# Altium PCB wrist_band.PcbDoc
Units mm, origin at the board's own origin, x right, y up, seen from the top; angles counter-clockwise.
Board outline 221.25 x 41.05 mm, 2 copper layers (Top Layer, Bottom Layer), stack 0.279 mm thick; 17 components, 16 nets, 34 pads, 16 vias.
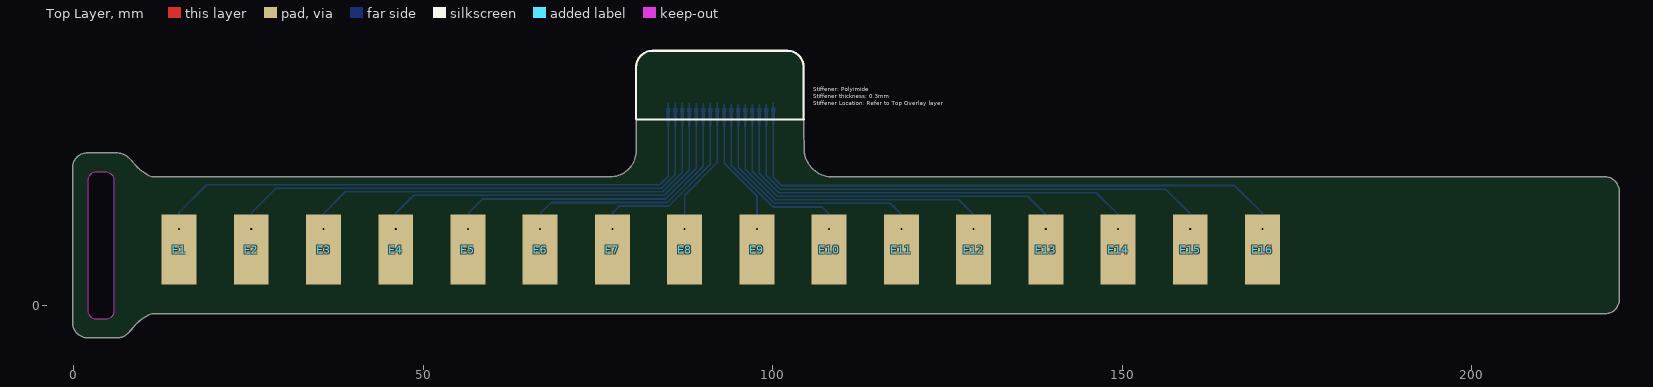
[diagram p0: Top Layer view]
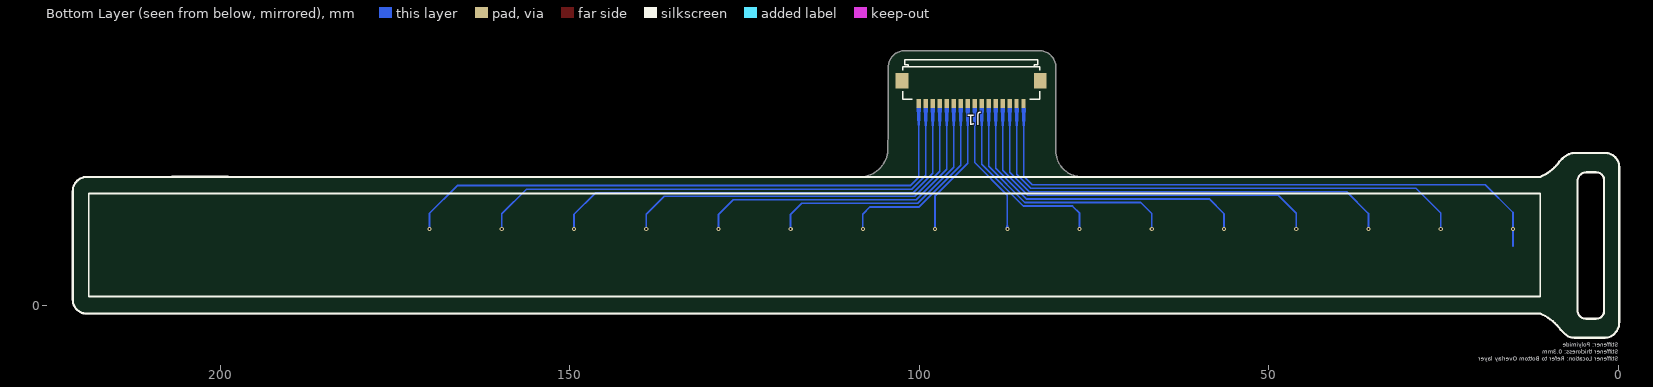
[diagram p1: Bottom Layer view, seen from below]

## Layer stack, top to bottom
Top Stiffener: core 0.1, Core-009, Dk 4.5
Top Coverlay: solder mask 0.0125, FC-001, Dk 2.9
Adhesive 2: prepreg 0.015, PP-006, Dk 4.1
Top Layer: signal copper 0.012
Polymide: core 0.025, Core-009, Dk 3.3
Bottom Layer: signal copper 0.012
Adhesive 1: prepreg 0.015, PP-006, Dk 4.1
Bottom Coverlay Bottom Coverlay: solder mask 0.0125, FC-001, Dk 2.9
Bottom Stiffener: core 0.1, Core-009, Dk 4.5

## Board outline
221.12,0.801 221.12,16.336 ccw(c219.056,16.336) 219.171,18.397 ccw(c219.056,16.338) 219.056,18.4 ccw(c219.056,18.4) 219.056,18.4 206.904,18.4 ccw(c206.88,18.391) 206.889,18.415 204.47,18.415 198.882,18.415 198.882,18.4 108.325,18.4 cw(c108.555,22.449) 104.505,22.22 104.43,25.193 104.436,26.67 104.437,26.965 104.436,26.965 104.436,34.107 ccw(c102.107,34.107) 102.107,36.436 82.814,36.436 ccw(c82.814,34.103) 80.481,34.103 80.481,26.67 80.484,26.67 80.484,22.129 80.484,22.128 cw(c76.755,22.128) 76.755,18.4 13.937,18.4 11.176,18.4 cw(c13.726,24.449) 8.402,20.609 7.928,21.083 ccw(c6.132,19.287) 6.132,21.827 1.947,21.827 ccw(c1.947,19.725) 0.46,21.211 0.451,21.202 ccw(c1.846,19.807) -0.127,19.807 -0.127,-2.61 ccw(c1.697,-2.61) 0.407,-3.9 0.56,-4.053 ccw(c1.926,-2.688) 1.926,-4.619 6.294,-4.619 ccw(c6.294,-2.638) 7.695,-4.039 8.257,-3.476 cw(c13.757,-7.445) 11.176,-1.173 19.42,-1.172 219.147,-1.172 ccw(c219.147,0.801)
cut-out: 5.842,17.78 ccw(c4.572,17.78) 4.572,19.05 3.175,19.05 ccw(c3.175,17.907) 2.032,17.907 2.032,-0.762 ccw(c3.175,-0.762) 3.175,-1.905 4.639,-1.905 ccw(c4.639,-0.702) 5.842,-0.702
board region "Layer Stack Region 2": 11.176,18.4 10.971,18.491 10.57,18.693 10.184,18.922 9.815,19.177 9.464,19.456 9.133,19.759 8.823,20.084 8.536,20.429 8.402,20.609 7.928,21.083 7.751,21.26 7.335,21.538 6.873,21.729 6.382,21.827 6.132,21.827 1.947,21.827 1.74,21.827 1.334,21.746 0.951,21.588 0.607,21.358 0.46,21.211 0.451,21.202 0.313,21.064 0.097,20.741 -0.051,20.382 -0.127,20.001 -0.127,19.807 -0.127,-2.61 -0.127,-2.79 -0.057,-3.143 0.081,-3.475 0.28,-3.773 0.407,-3.9 0.56,-4.053 0.695,-4.188 1.011,-4.399 1.362,-4.545 1.735,-4.619 1.926,-4.619 6.294,-4.619 6.489,-4.619 6.872,-4.543 7.232,-4.393 7.557,-4.177 7.695,-4.039 8.257,-3.476 8.398,-3.288 8.699,-2.926 9.025,-2.586 9.373,-2.27 9.743,-1.978 10.132,-1.713 10.538,-1.475 10.96,-1.266 11.176,-1.173
board region "Layer Stack Region 3": 219.147,-1.172 219.341,-1.172 219.722,-1.096 220.081,-0.948 220.404,-0.732 220.679,-0.457 220.895,-0.134 221.044,0.225 221.12,0.607 221.12,0.801 221.12,16.336 221.12,16.539 221.04,16.938 220.885,17.313 220.659,17.651 220.371,17.939 220.033,18.165 219.658,18.321 219.259,18.4 219.056,18.4 11.176,18.4 11.176,16.002 218.821,16.002 218.821,1.261 11.176,1.261 11.176,-1.172
board region "Layer Stack Region 1": 80.481,26.67 104.436,26.67 104.436,34.107 104.436,34.336 104.347,34.786 104.171,35.21 103.916,35.591 103.592,35.916 103.21,36.171 102.786,36.346 102.336,36.436 102.107,36.436 82.814,36.436 82.584,36.436 82.134,36.346 81.709,36.17 81.327,35.915 81.002,35.59 80.747,35.208 80.571,34.783 80.481,34.333 80.481,34.103
board region "Default Layer Stack Region": 104.436,26.67 104.437,26.965 104.436,26.965
board region "Default Layer Stack Region": 11.176,1.261 218.821,1.261 218.821,16.002 11.176,16.002
board region "Default Layer Stack Region": 219.056,18.4 206.904,18.4 206.903,18.403 206.9,18.407 206.896,18.411 206.892,18.414 206.889,18.415 204.47,18.415 198.882,18.415 198.882,18.4 108.325,18.4 108.079,18.422 107.595,18.509 107.124,18.654 106.675,18.855 106.253,19.11 105.866,19.413 105.518,19.761 105.214,20.149 104.96,20.571 104.759,21.02 104.614,21.49 104.527,21.975 104.505,22.22 104.43,25.193 104.436,26.67 80.484,26.67 80.484,22.129 80.476,21.885 80.412,21.401 80.286,20.93 80.099,20.479 79.855,20.057 79.558,19.67 79.213,19.325 78.827,19.028 78.404,18.784 77.954,18.598 77.482,18.472 76.999,18.408 76.755,18.4 13.937,18.4
board region "Default Layer Stack Region": 11.176,-1.173 19.42,-1.172 11.176,-1.172
board region "Default Layer Stack Region": 221.12,0.801 221.12,16.336 221.12,16.532 221.046,16.917 220.901,17.281 220.69,17.612 220.421,17.897 220.103,18.126 219.747,18.291 219.367,18.386 219.171,18.397 219.365,18.376 219.744,18.282 220.098,18.117 220.415,17.889 220.683,17.606 220.893,17.277 221.037,16.914 221.111,16.531 221.12,16.336

## Design rules (kind name [scope] priority, off if disabled: settings)
Clearance [All] p1: gap=0.254 ignorepadtopadclearanceinfootprint=FALSE
DiffPairsRouting [All] p1: maxlimit=0.254 minlimit=0.254 mostfreqgap=0.254 substack1={8E3EEC1E-AD67-44B2-8733-3EAEC3E02F30} toplayer_{8e3eec1e-ad67-44b2-8733-3eaec3e02f30}_minwidth=0.381 toplayer_{8e3eec1e-ad67-44b2-8733-3eaec3e02f30}_maxwidth=0.381 toplayer_{8e3eec1e-ad67-44b2-8733-3eaec3e02f30}_prefwidth=0.381 bottomlayer_{8e3eec1e-ad67-44b2-8733-3eaec3e02f30}_minwidth=0.381 bottomlayer_{8e3eec1e-ad67-44b2-8733-3eaec3e02f30}_maxwidth=0.381 bottomlayer_{8e3eec1e-ad67-44b2-8733-3eaec3e02f30}_prefwidth=0.381 toplayer_minwidth=0.381 toplayer_maxwidth=0.381 toplayer_prefwidth=0.381 bottomlayer_minwidth=0.381 bottomlayer_maxwidth=0.381 bottomlayer_prefwidth=0.381 substack2={7A5BB304-4138-4556-AE49-C83C906E223E} toplayer_{7a5bb304-4138-4556-ae49-c83c906e223e}_minwidth=0.381 toplayer_{7a5bb304-4138-4556-ae49-c83c906e223e}_maxwidth=0.381 toplayer_{7a5bb304-4138-4556-ae49-c83c906e223e}_prefwidth=0.381 bottomlayer_{7a5bb304-4138-4556-ae49-c83c906e223e}_minwidth=0.381 bottomlayer_{7a5bb304-4138-4556-ae49-c83c906e223e}_maxwidth=0.381 bottomlayer_{7a5bb304-4138-4556-ae49-c83c906e223e}_prefwidth=0.381 substack3={965A8176-D692-4E5F-9881-1658D9A3CD79} toplayer_{965a8176-d692-4e5f-9881-1658d9a3cd79}_minwidth=0.381 toplayer_{965a8176-d692-4e5f-9881-1658d9a3cd79}_maxwidth=0.381 toplayer_{965a8176-d692-4e5f-9881-1658d9a3cd79}_prefwidth=0.381 bottomlayer_{965a8176-d692-4e5f-9881-1658d9a3cd79}_minwidth=0.381 bottomlayer_{965a8176-d692-4e5f-9881-1658d9a3cd79}_maxwidth=0.381 bottomlayer_{965a8176-d692-4e5f-9881-1658d9a3cd79}_prefwidth=0.381 substack4={865F3FD6-8B44-4D79-8728-6E912CB7AA23} toplayer_{865f3fd6-8b44-4d79-8728-6e912cb7aa23}_minwidth=0.381 toplayer_{865f3fd6-8b44-4d79-8728-6e912cb7aa23}_maxwidth=0.381 toplayer_{865f3fd6-8b44-4d79-8728-6e912cb7aa23}_prefwidth=0.381 bottomlayer_{865f3fd6-8b44-4d79-8728-6e912cb7aa23}_minwidth=0.381 bottomlayer_{865f3fd6-8b44-4d79-8728-6e912cb7aa23}_maxwidth=0.381 bottomlayer_{865f3fd6-8b44-4d79-8728-6e912cb7aa23}_prefwidth=0.381 substack5={08DB2408-79A5-44FA-A111-CA01F740DCBA} toplayer_{08db2408-79a5-44fa-a111-ca01f740dcba}_minwidth=0.381 toplayer_{08db2408-79a5-44fa-a111-ca01f740dcba}_maxwidth=0.381 toplayer_{08db2408-79a5-44fa-a111-ca01f740dcba}_prefwidth=0.381 bottomlayer_{08db2408-79a5-44fa-a111-ca01f740dcba}_minwidth=0.381 bottomlayer_{08db2408-79a5-44fa-a111-ca01f740dcba}_maxwidth=0.381 bottomlayer_{08db2408-79a5-44fa-a111-ca01f740dcba}_prefwidth=0.381 maxuncoupledlength=12.7
PolygonConnect [All] p1: connectstyle=Relief reliefconductorwidth=0.254 reliefentries=4 polygonreliefangle="90 Angle" airgapwidth=0.254
RoutingVias [All] p1: holewidth=0.711 width=1.27 viastyle="Through Hole" minholewidth=0.15 minwidth=0.35 maxholewidth=0.711 maxwidth=1.27
SolderMaskExpansion [All] p1: expansion=0.102 istentingtop=FALSE
Width [All] p1: maxlimit=0.6 minlimit=0.6 preferedwidth=0.6 substack1={8E3EEC1E-AD67-44B2-8733-3EAEC3E02F30} toplayer_{8e3eec1e-ad67-44b2-8733-3eaec3e02f30}_minwidth=0.254 toplayer_{8e3eec1e-ad67-44b2-8733-3eaec3e02f30}_maxwidth=0.254 toplayer_{8e3eec1e-ad67-44b2-8733-3eaec3e02f30}_prefwidth=0.254 bottomlayer_{8e3eec1e-ad67-44b2-8733-3eaec3e02f30}_minwidth=0.254 bottomlayer_{8e3eec1e-ad67-44b2-8733-3eaec3e02f30}_maxwidth=0.254 bottomlayer_{8e3eec1e-ad67-44b2-8733-3eaec3e02f30}_prefwidth=0.254 substack2={7A5BB304-4138-4556-AE49-C83C906E223E} toplayer_{7a5bb304-4138-4556-ae49-c83c906e223e}_minwidth=0.254 toplayer_{7a5bb304-4138-4556-ae49-c83c906e223e}_maxwidth=0.254 toplayer_{7a5bb304-4138-4556-ae49-c83c906e223e}_prefwidth=0.254 bottomlayer_{7a5bb304-4138-4556-ae49-c83c906e223e}_minwidth=0.254 bottomlayer_{7a5bb304-4138-4556-ae49-c83c906e223e}_maxwidth=0.254 bottomlayer_{7a5bb304-4138-4556-ae49-c83c906e223e}_prefwidth=0.254 substack3={965A8176-D692-4E5F-9881-1658D9A3CD79} toplayer_{965a8176-d692-4e5f-9881-1658d9a3cd79}_minwidth=0.254 toplayer_{965a8176-d692-4e5f-9881-1658d9a3cd79}_maxwidth=0.254 toplayer_{965a8176-d692-4e5f-9881-1658d9a3cd79}_prefwidth=0.254 bottomlayer_{965a8176-d692-4e5f-9881-1658d9a3cd79}_minwidth=0.254 bottomlayer_{965a8176-d692-4e5f-9881-1658d9a3cd79}_maxwidth=0.254 bottomlayer_{965a8176-d692-4e5f-9881-1658d9a3cd79}_prefwidth=0.254 substack4={865F3FD6-8B44-4D79-8728-6E912CB7AA23} toplayer_{865f3fd6-8b44-4d79-8728-6e912cb7aa23}_minwidth=0.254 toplayer_{865f3fd6-8b44-4d79-8728-6e912cb7aa23}_maxwidth=0.254 toplayer_{865f3fd6-8b44-4d79-8728-6e912cb7aa23}_prefwidth=0.254 bottomlayer_{865f3fd6-8b44-4d79-8728-6e912cb7aa23}_minwidth=0.254 bottomlayer_{865f3fd6-8b44-4d79-8728-6e912cb7aa23}_maxwidth=0.254 bottomlayer_{865f3fd6-8b44-4d79-8728-6e912cb7aa23}_prefwidth=0.254 substack5={08DB2408-79A5-44FA-A111-CA01F740DCBA} toplayer_{08db2408-79a5-44fa-a111-ca01f740dcba}_minwidth=0.254 toplayer_{08db2408-79a5-44fa-a111-ca01f740dcba}_maxwidth=0.254 toplayer_{08db2408-79a5-44fa-a111-ca01f740dcba}_prefwidth=0.254 bottomlayer_{08db2408-79a5-44fa-a111-ca01f740dcba}_minwidth=0.254 bottomlayer_{08db2408-79a5-44fa-a111-ca01f740dcba}_maxwidth=0.254 bottomlayer_{08db2408-79a5-44fa-a111-ca01f740dcba}_prefwidth=0.254
29 further rules are at their usual default settings.

## Components (designator, comment, footprint, x,y, rotation, side; value= is the part's Value field where it differs from the comment)
E1 "Squre Electrode" E 15.08,10.929 r270 top
E2 "Squre Electrode" E 25.413,10.929 r270 top
E3 "Squre Electrode" E 35.747,10.929 r270 top
E4 "Squre Electrode" E 46.08,10.929 r270 top
E5 "Squre Electrode" E 56.413,10.929 r270 top
E6 "Squre Electrode" E 66.747,10.929 r270 top
E7 "Squre Electrode" E 77.08,10.929 r270 top
E8 "Squre Electrode" E 87.413,10.929 r270 top
E9 "Squre Electrode" E 97.747,10.929 r270 top
E10 "Squre Electrode" E 108.08,10.929 r270 top
E11 "Squre Electrode" E 118.413,10.929 r270 top
E12 "Squre Electrode" E 128.747,10.929 r270 top
E13 "Squre Electrode" E 139.08,10.929 r270 top
E14 "Squre Electrode" E 149.413,10.929 r270 top
E15 "Squre Electrode" E 159.747,10.929 r270 top
E16 "Squre Electrode" E 170.08,10.929 r270 top
J1 "FH12-16S-1SH(55)" FH12-16S-1SH(55) 92.71,31.877 r180 bottom

## Footprints (in the part's own frame and the unit in brackets; to place one, negate y for a bottom-side part, rotate by r counter-clockwise, add the part's x,y. Pads: shape width x height; smd on the part's side, far side on the other; paste and mask are expansions set on the pad)
E [mm] "Squre_Electrode"
  rect 10x5 smd: 1(2.929,0)
FH12-16S-1SH(55) [mm] "FH12-16S-1SH(55)"
  rect 0.6x1.3 smd: 1(7.627,-2.998) 2(6.627,-2.998) 3(5.627,-2.998) 4(4.627,-2.998) 5(3.627,-2.998) 6(2.627,-2.998) 7(1.627,-2.998) 8(0.627,-2.998) 9(-0.373,-2.998) 10(-1.373,-2.998) 11(-2.373,-2.998) 12(-3.373,-2.998) 13(-4.373,-2.998) 14(-5.373,-2.998) 15(-6.373,-2.998) 16(-7.373,-2.998)
  rect 1.8x2.2 smd: 17(10.027,0.252) 18(-9.773,0.252)
  silkscreen extent -9.67,-2.35 9.93,3.25, body extent -10.23,-3.25 10.37,3.15, height 2.04

## Part data
E1 E2 E3 E4 E5 E6 E7 E8 E9 E10 E11 E12 E13 E14 E15 E16: library part E

## Via types
v1: diameter 0.6, hole 0.3, Top Layer to Bottom Layer, tented bottom, 16 vias

## Nets (pads, with @x,y where several pads share a name; then routed paths per layer and width w, separated by ;. In a path a pad name is that pad's centre, name@x,y a point inside that pad or via, vN(x,y) a via of type N, cw(c..) or ccw(c..) an arc to the next point about the centre after c; other vN are vias at no path point)
NetE1_1: E1.1 J1.1 | length 87.3
  Bottom Layer w0.254: 15.08,8.509 v1(15.08,10.929) 15.08,13.302 19.05,17.272 83.871,17.272 85.083,18.484 J1.1
NetE2_1: E2.1 J1.2 | length 75.4
  Bottom Layer w0.254: v1(25.413,10.929) 25.413,13.221 28.956,16.764 84.081,16.764 86.083,18.766 J1.2
NetE3_1: E3.1 J1.3 | length 65.8
  Bottom Layer w0.254: v1(35.747,10.929) 35.747,13.141 38.862,16.256 84.292,16.256 87.083,19.047 J1.3
NetE4_1: E4.1 J1.4 | length 56.4
  Bottom Layer w0.254: v1(46.08,10.929) 46.08,13.187 48.641,15.748 84.502,15.748 88.083,19.329 J1.4
NetE5_1: E5.1 J1.5 | length 46.8
  Bottom Layer w0.254: v1(56.413,10.929) 56.413,13.106 58.547,15.24 84.713,15.24 89.083,19.61 J1.5
NetE6_1: E6.1 J1.6 | length 37.3
  Bottom Layer w0.254: v1(66.747,10.929) 66.747,13.153 68.326,14.732 84.923,14.732 90.083,19.892 J1.6
NetE7_1: E7.1 J1.7 | length 27.9
  Bottom Layer w0.254: v1(77.08,10.929) 77.08,13.199 78.105,14.224 85.134,14.224 91.083,20.173 J1.7
NetE8_1: E8.1 J1.8 | length 19.9
  Bottom Layer w0.254: v1@87.419,10.929 87.419,15.791 92.083,20.455 J1.8
  other v1: 87.413,10.929
NetE9_1: E9.1 J1.9 | length 19.9
  Bottom Layer w0.254: J1.9@93.083,28.752 93.083,20.328 97.747,15.664 v1@97.747,10.802
  other v1: 97.747,10.929
NetE10_1: E10.1 J1.10 | length 27.9
  Bottom Layer w0.254: J1.10@94.083,28.752 94.083,20.046 100.032,14.097 107.061,14.097 108.086,13.072 v1@108.086,10.802
  other v1: 108.08,10.929
NetE11_1: E11.1 J1.11 | length 37.3
  Bottom Layer w0.254: J1.11@95.083,28.752 95.083,19.765 100.243,14.605 116.84,14.605 118.419,13.026 v1@118.419,10.802
  other v1: 118.413,10.929
NetE12_1: E12.1 J1.12 | length 46.8
  Bottom Layer w0.254: J1.12@96.083,28.752 96.083,19.483 100.453,15.113 126.619,15.113 128.753,12.979 v1@128.753,10.802
  other v1: 128.747,10.929
NetE13_1: E13.1 J1.13 | length 56.4
  Bottom Layer w0.254: J1.13@97.083,28.752 97.083,19.202 100.664,15.621 136.525,15.621 139.086,13.06 v1@139.086,10.802
  other v1: 139.08,10.929
NetE14_1: E14.1 J1.14 | length 65.8
  Bottom Layer w0.254: J1.14@98.083,28.752 98.083,18.92 100.874,16.129 146.304,16.129 149.419,13.014 v1@149.419,10.802
  other v1: 149.413,10.929
NetE15_1: E15.1 J1.15 | length 75.4
  Bottom Layer w0.254: J1.15@99.083,28.752 99.083,18.639 101.085,16.637 156.21,16.637 159.753,13.094 v1@159.753,10.802
  other v1: 159.747,10.929
NetE16_1: E16.1 J1.16 | length 85
  Bottom Layer w0.254: J1.16 100.083,26.67 100.083,18.4 100.083,18.357 101.295,17.145 166.116,17.145 170.086,13.175 v1@170.086,10.802
  other v1: 170.08,10.929
pads on no net: J1.17 J1.18

## Polygon pours and split planes (outlines as drawn)
no net on Layer0 "Default Coverlay 4 Top" (split plane): 220.589,-0.539 220.715,-0.404 220.914,-0.092 221.05,0.252 221.119,0.615 221.119,0.8 221.12,0.8 221.12,0.801 221.12,16.336 221.12,16.539 221.04,16.938 220.885,17.314 220.659,17.652 220.371,17.939 220.033,18.165 219.658,18.321 219.259,18.4 219.056,18.4 206.904,18.4 206.903,18.403 206.9,18.407 206.896,18.411 206.892,18.414 206.889,18.415 204.47,18.415 198.882,18.415 198.882,18.4 108.325,18.4 108.079,18.422 107.595,18.509 107.124,18.654 106.675,18.855 106.254,19.11 105.866,19.413 105.518,19.761 105.214,20.149 104.96,20.57 104.759,21.02 104.614,21.49 104.527,21.975 104.505,22.22 104.43,25.193 104.436,26.67 104.436,34.107 80.484,34.103 80.484,22.129 80.476,21.885 80.412,21.401 80.286,20.93 80.099,20.479 79.855,20.057 79.558,19.67 79.213,19.325 78.827,19.028 78.404,18.785 77.953,18.598 77.482,18.472 76.999,18.408 76.755,18.4 10.67,18.4 10.666,-1.173 105.6,-1.165 219.141,-1.165 219.337,-1.165 219.721,-1.088 220.083,-0.939 220.408,-0.721 220.547,-0.583 220.552,-0.577 220.563,-0.567 220.573,-0.556 220.584,-0.545
no net on Layer0 "Default Coverlay 4 Bottom" (split plane): 220.589,-0.539 220.715,-0.404 220.914,-0.092 221.05,0.252 221.119,0.615 221.119,0.8 221.12,0.8 221.12,0.801 221.12,16.336 221.12,16.539 221.04,16.938 220.885,17.314 220.659,17.652 220.371,17.939 220.033,18.165 219.658,18.321 219.259,18.4 219.056,18.4 206.904,18.4 206.903,18.403 206.9,18.407 206.896,18.411 206.892,18.414 206.889,18.415 204.47,18.415 198.882,18.415 198.882,18.4 108.325,18.4 108.079,18.422 107.595,18.509 107.124,18.654 106.675,18.855 106.254,19.11 105.866,19.413 105.518,19.761 105.214,20.149 104.96,20.57 104.759,21.02 104.614,21.49 104.527,21.975 104.505,22.22 104.43,25.193 104.436,26.67 104.436,34.107 80.484,34.103 80.484,22.129 80.476,21.885 80.412,21.401 80.286,20.93 80.099,20.479 79.855,20.057 79.558,19.67 79.213,19.325 78.827,19.028 78.404,18.785 77.953,18.598 77.482,18.472 76.999,18.408 76.755,18.4 10.67,18.4 10.666,-1.173 105.6,-1.165 219.141,-1.165 219.337,-1.165 219.721,-1.088 220.083,-0.939 220.408,-0.721 220.547,-0.583 220.552,-0.577 220.563,-0.567 220.573,-0.556 220.584,-0.545
no net on Layer0 "Default Coverlay 2 Top" (split plane): 11.049,18.4 11.049,16.002 218.821,16.002 218.821,1.261 11.049,1.261 11.049,-1.172 219.341,-1.172 219.722,-1.096 220.081,-0.948 220.404,-0.732 220.679,-0.457 220.895,-0.134 221.044,0.225 221.12,0.607 221.12,0.801 221.12,16.336 221.12,16.539 221.04,16.938 220.885,17.313 220.659,17.651 220.371,17.939 220.033,18.165 219.658,18.321 219.259,18.4 219.056,18.4
no net on Layer0 "Default Coverlay 2 Bottom" (split plane): 11.049,18.4 11.049,16.002 218.821,16.002 218.821,1.261 11.049,1.261 11.049,-1.172 219.341,-1.172 219.722,-1.096 220.081,-0.948 220.404,-0.732 220.679,-0.457 220.895,-0.134 221.044,0.225 221.12,0.607 221.12,0.801 221.12,16.336 221.12,16.539 221.04,16.938 220.885,17.313 220.659,17.651 220.371,17.939 220.033,18.165 219.658,18.321 219.259,18.4 219.056,18.4
no net on Layer0 "Default Coverlay 3 Top" (split plane): 104.436,26.67 104.436,34.336 104.347,34.786 104.171,35.21 103.916,35.591 103.592,35.916 103.21,36.171 102.786,36.346 102.336,36.436 82.584,36.436 82.134,36.346 81.709,36.17 81.327,35.915 81.002,35.59 80.747,35.208 80.571,34.783 80.481,34.333 80.481,34.103 80.481,26.67
no net on Layer0 "Default Coverlay 3 Bottom" (split plane): 104.436,26.67 104.436,34.336 104.347,34.786 104.171,35.21 103.916,35.591 103.592,35.916 103.21,36.171 102.786,36.346 102.336,36.436 82.584,36.436 82.134,36.346 81.709,36.17 81.327,35.915 81.002,35.59 80.747,35.208 80.571,34.783 80.481,34.333 80.481,34.103 80.481,26.67

## Silkscreen, mask and mechanical layers (free items; w line width, h text height)
Board Layer Stack Top Overlay:
  lines w0.254: 80.523,26.619 104.478,26.619
  lines w0.3: 80.481,26.67 80.481,34.103 cw(c82.814,34.103) 82.814,36.436 102.107,36.436 cw(c102.107,34.107) 104.436,34.107 104.436,26.67
  text "Stiffener: Polyimide / Stiffener thickness: 0.3mm / Stiffener Location: Refer to Top Overlay layer" at 105.791,28.448 h1
Board Layer Stack Bottom Overlay:
  lines w0.254: 11.176,1.261 11.176,16.002 218.821,16.002 218.821,1.261 11.176,1.261
  lines w0.3: 0.451,21.202 ccw(c1.845,19.807) -0.127,19.807 -0.127,-2.383 ccw(c2.245,-2.383) 0.568,-4.061 ; 0.46,21.211 cw(c1.947,19.725) 1.947,21.827 6.132,21.827 cw(c6.132,19.287) 7.928,21.083 8.402,20.609 ccw(c13.726,24.449) 11.176,18.4 ; 0.56,-4.053 ccw(c1.926,-2.688) 1.926,-4.619 6.294,-4.619 ccw(c6.294,-2.638) 7.695,-4.039 8.257,-3.476 cw(c13.757,-7.445) 11.176,-1.173 ; 11.176,-1.172 19.408,-1.172 ; 11.264,18.4 108.325,18.4 198.882,18.4 ; 13.937,18.4 76.755,18.4 ; 19.42,-1.172 219.147,-1.172 ccw(c219.147,0.801) 221.12,0.801 221.12,16.336 ccw(c219.056,16.336) 219.079,18.4 ; 198.882,18.415 204.47,18.415 206.889,18.415 ; 206.904,18.4 219.056,18.4 ; 2.032,-0.762 ccw(c3.175,-0.762) 3.175,-1.905 4.639,-1.905 ccw(c4.639,-0.702) 5.842,-0.702 5.842,17.78 ccw(c4.572,17.78) 4.572,19.05 3.175,19.05 ccw(c3.175,17.907) 2.032,17.907 2.032,-0.762
  text "Stiffener: Polyimide / Stiffener thickness: 0.3mm / Stiffener Location: Refer to Bottom Overlay layer" at 0,-8.128 h1
Mechanical 13:
  lines w0.3: 11.264,-1.23 19.495,-1.229 ; 11.264,18.343 14.025,18.343 76.843,18.343 ; 12.587,18.4 11.176,18.4 ; 12.675,18.343 76.843,18.343 ; 19.408,-1.172 219.147,-1.172 ccw(c219.147,0.801) 221.12,0.801 221.12,16.336 ccw(c219.056,16.336) 219.126,18.399 ccw(c219.056,16.342) 219.056,18.4 ; 19.42,-1.172 11.176,-1.173 ; 19.508,-1.229 219.234,-1.229 ccw(c219.234,0.744) 221.208,0.744 221.208,16.279 ccw(c219.144,16.279) 219.167,18.343 ; 80.523,26.619 80.523,34.052 cw(c82.856,34.052) 82.856,36.385 102.149,36.385 cw(c102.149,34.056) 104.478,34.056 104.478,26.619 ; 108.412,18.343 198.97,18.343 ; 198.97,18.358 204.558,18.358 206.977,18.358 ; 206.992,18.343 219.144,18.343 ; 219.079,18.4 ccw(c219.057,16.487) 219.056,18.4 ; -0.127,-2.61 ccw(c1.697,-2.61) 0.407,-3.9 ; -0.127,-2.61 ccw(c1.697,-2.61) 0.407,-3.9 ; -0.127,-2.61 -0.127,19.807 ; -0.127,-2.61 -0.127,19.807 ; -0.127,19.807 cw(c1.846,19.807) 0.451,21.202 ; -0.127,19.807 cw(c1.845,19.807) 0.451,21.202 ; 0.407,-3.9 0.56,-4.053 ; 0.407,-3.9 0.56,-4.053 ; 0.451,21.202 0.46,21.211 ; 0.451,21.202 0.46,21.211 ; 0.46,21.211 cw(c1.947,19.725) 1.947,21.827 ; 0.46,21.211 cw(c1.947,19.725) 1.947,21.827 ; 0.56,-4.053 ccw(c1.926,-2.688) 1.926,-4.619 ; 0.56,-4.053 ccw(c1.926,-2.688) 1.926,-4.619 ; 1.926,-4.619 6.294,-4.619 ; 1.926,-4.619 6.294,-4.619 ; 1.947,21.827 6.132,21.827 ; 1.947,21.827 6.132,21.827 ; 2.032,-0.762 ccw(c3.175,-0.762) 3.175,-1.905 ; 2.032,-0.762 ccw(c3.175,-0.762) 3.175,-1.905 ; 2.032,-0.762 ccw(c3.175,-0.762) 3.175,-1.905 ; 2.032,-0.762 ccw(c3.175,-0.762) 3.175,-1.905 ; 2.032,-0.762 2.032,17.907 ; 2.032,-0.762 2.032,17.907 ; 2.032,-0.762 2.032,17.907 ; 2.032,-0.762 2.032,17.907 ; 2.032,17.907 cw(c3.175,17.907) 3.175,19.05 ; 2.032,17.907 cw(c3.175,17.907) 3.175,19.05 ; 2.032,17.907 cw(c3.175,17.907) 3.175,19.05 ; 2.032,17.907 cw(c3.175,17.907) 3.175,19.05 ; 3.175,-1.905 4.639,-1.905 ; 3.175,-1.905 4.639,-1.905 ; 3.175,-1.905 4.639,-1.905 ; 3.175,-1.905 4.639,-1.905 ; 3.175,19.05 4.572,19.05 ; 3.175,19.05 4.572,19.05 ; 3.175,19.05 4.572,19.05 ; 3.175,19.05 4.572,19.05 ; 4.572,19.05 cw(c4.572,17.78) 5.842,17.78 ; 4.572,19.05 cw(c4.572,17.78) 5.842,17.78 ; 4.572,19.05 cw(c4.572,17.78) 5.842,17.78 ; 4.572,19.05 cw(c4.572,17.78) 5.842,17.78 ; 4.639,-1.905 ccw(c4.639,-0.702) 5.842,-0.702 ; 4.639,-1.905 ccw(c4.639,-0.702) 5.842,-0.702 ; 4.639,-1.905 ccw(c4.639,-0.702) 5.842,-0.702 ; 4.639,-1.905 ccw(c4.639,-0.702) 5.842,-0.702 ; 5.842,-0.702 5.842,17.78 ; 5.842,-0.702 5.842,17.78 ; 5.842,-0.702 5.842,17.78 ; 5.842,-0.702 5.842,17.78 ; 6.132,21.827 cw(c6.132,19.287) 7.928,21.083 ; 6.132,21.827 cw(c6.132,19.287) 7.928,21.083 ; 6.294,-4.619 ccw(c6.294,-2.638) 7.695,-4.039 ; 6.294,-4.619 ccw(c6.294,-2.638) 7.695,-4.039 ; 7.695,-4.039 8.257,-3.476 ; 7.695,-4.039 8.257,-3.476 ; 7.928,21.083 8.402,20.609 ; 7.928,21.083 8.402,20.609 ; 8.257,-3.476 cw(c13.757,-7.445) 11.176,-1.173 ; 8.257,-3.476 cw(c13.757,-7.445) 11.176,-1.173 ; 8.402,20.609 ccw(c13.726,24.449) 11.176,18.4 ; 8.402,20.609 ccw(c13.726,24.449) 11.176,18.4 ; 80.481,26.67 80.484,26.67 ; 80.481,26.67 80.481,34.103 cw(c82.814,34.103) 82.814,36.436 102.107,36.436 cw(c102.107,34.107) 104.436,34.107 104.436,26.67 ; 80.481,26.67 80.484,26.67 ; 80.484,22.128 cw(c76.755,22.128) 76.755,18.4 ccw(c76.755,22.128) 80.484,22.128 ; 80.484,22.128 80.484,22.129 ; 80.484,22.129 80.484,26.67 ; 80.484,22.128 80.484,22.129 ; 80.484,22.129 80.484,26.67 ; 104.43,25.193 104.436,26.67 ; 104.43,25.193 104.505,22.22 ; 104.43,25.193 104.436,26.67 ; 104.43,25.193 104.505,22.22 ; 104.505,22.22 ccw(c108.555,22.449) 108.325,18.4 ; 104.505,22.22 ccw(c108.555,22.449) 108.325,18.4 ; 108.325,18.4 198.882,18.4 ; 198.882,18.4 198.882,18.415 ; 198.882,18.4 198.882,18.415 ; 198.882,18.415 204.47,18.415 206.889,18.415 ; 206.889,18.415 cw(c206.88,18.39) 206.904,18.4 ; 206.889,18.415 cw(c206.88,18.39) 206.904,18.4 ; 206.889,18.415 206.889,18.415 ; 206.889,18.415 206.889,18.415 ; 206.904,18.4 219.056,18.4 ; 219.056,18.4 ccw(c219.056,18.4) 219.056,18.4 ; 219.056,18.4 ccw(c219.056,18.4) 219.056,18.4